# EAGLE board NN22_7Lvl_ResSrcAdapter02_s00 (EAGLE 7.7.0)
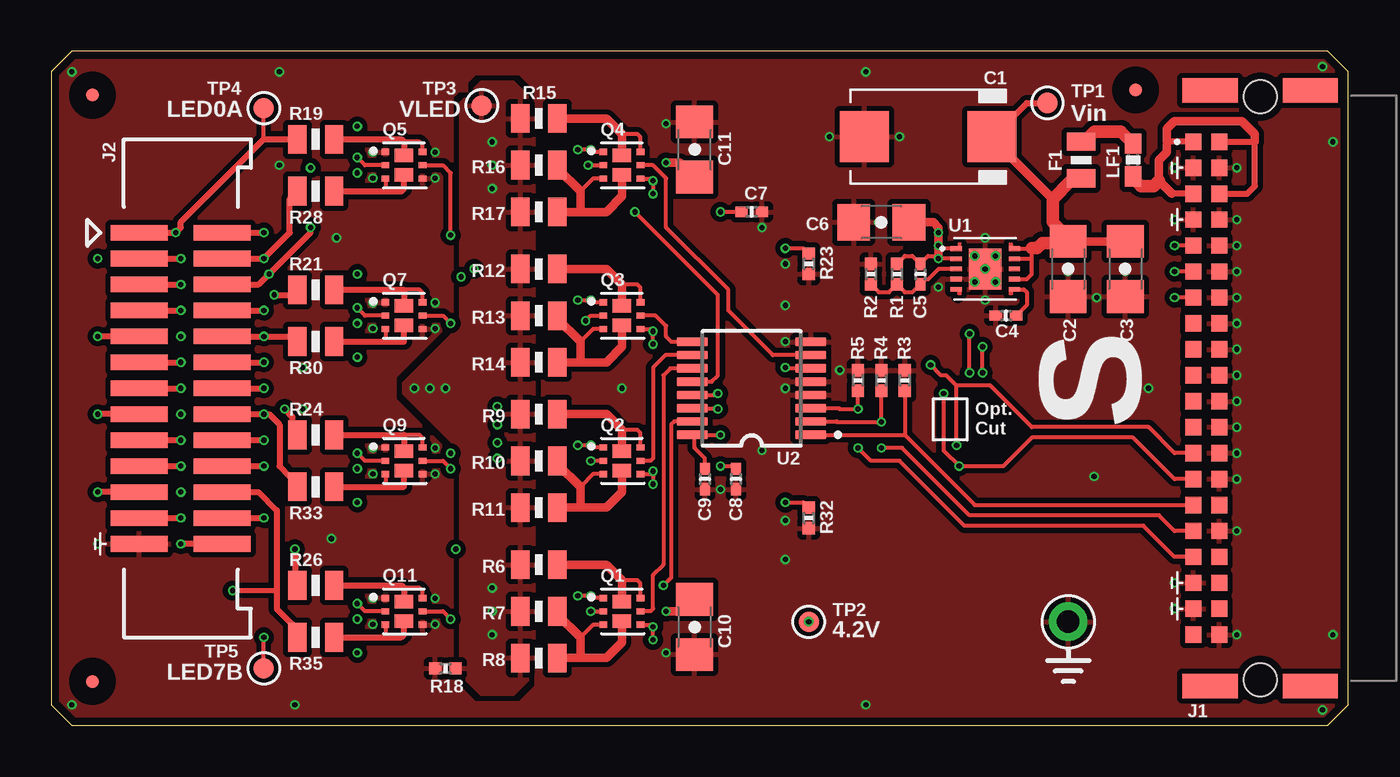
[diagram p0: board, top side]
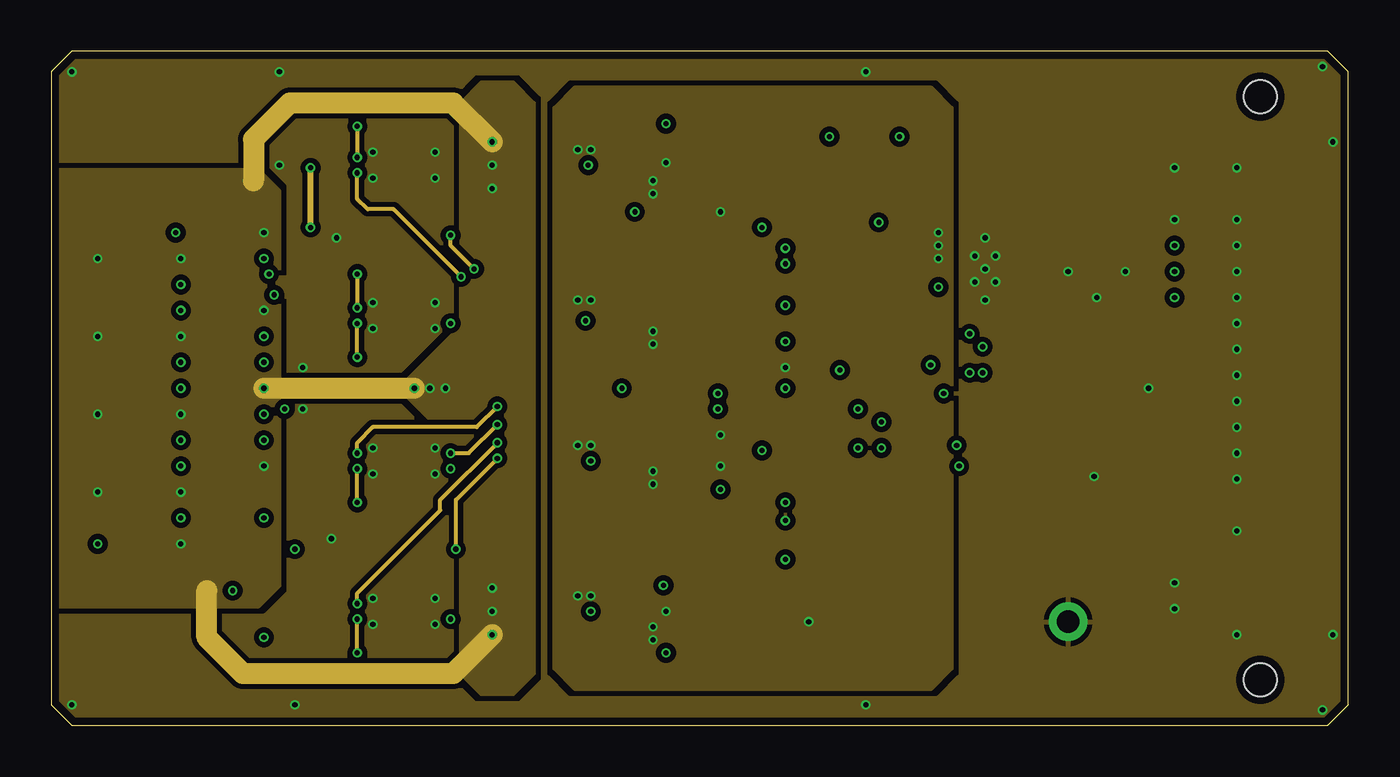
[diagram p1: board, inner layer Route2]
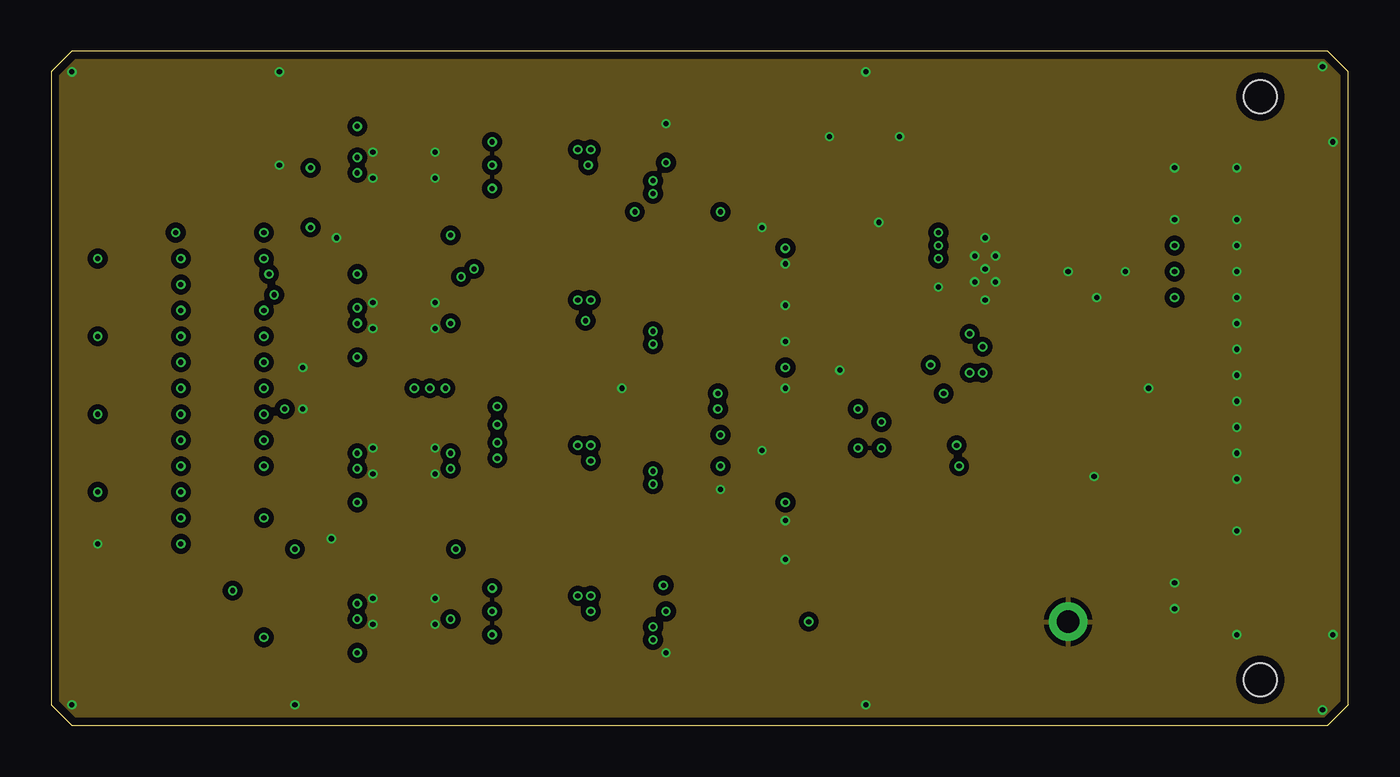
[diagram p2: board, inner layer Route15]
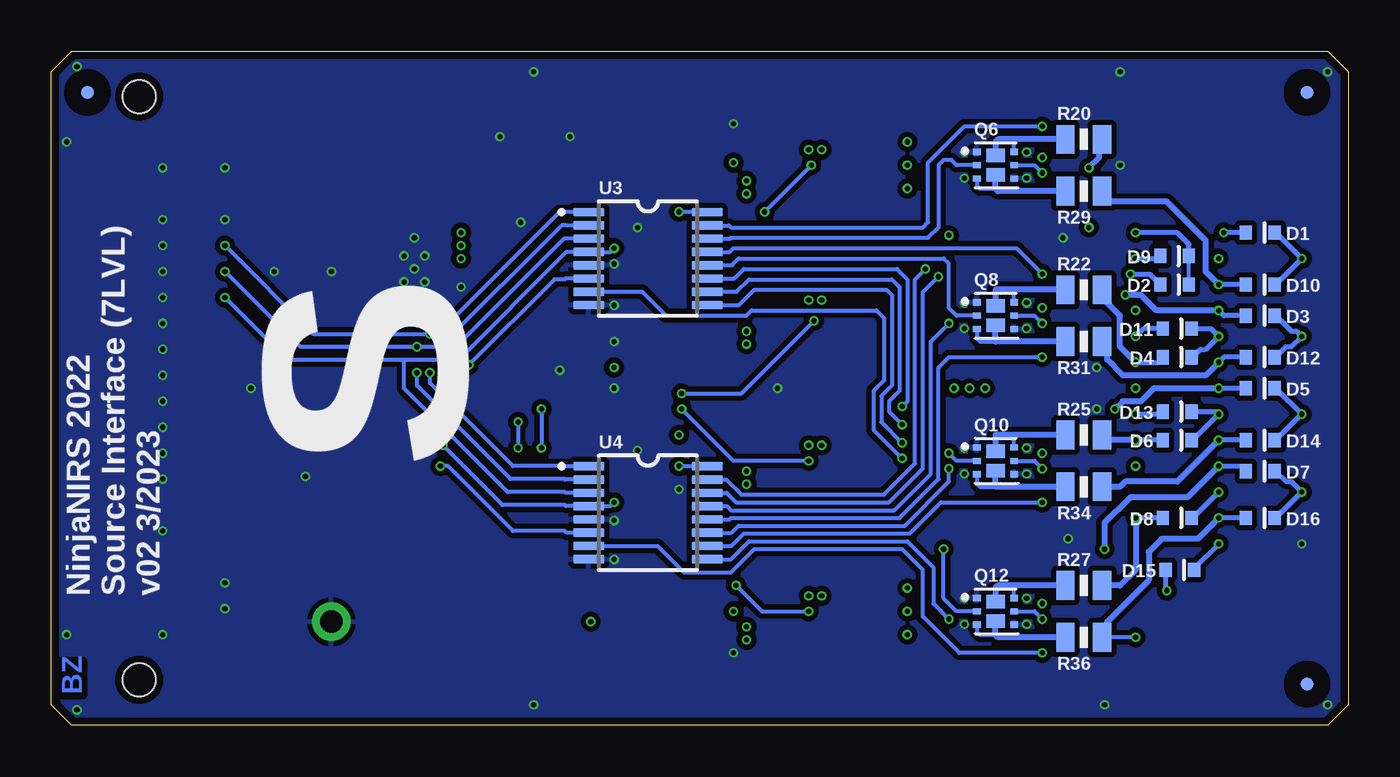
[diagram p3: board, bottom side, seen from below]

Size 63.5 x 33.02 mm. Coordinates in mm from the lower left corner, seen from the top.
Outline: 63.5,1.02 63.5,32 62.48,33.02 1.02,33.02 0,32 0,1.02 1.02,0 62.48,0 63.5,1.02
Copper layers (1*2*15*16): Top 0.035559375mm / dielectric 0.17018125mm / Route2 0.01778125mm / dielectric 47mil / Route15 0.01778125mm / dielectric 0.17018125mm / Bottom 0.035559375mm
Design rules "OSHPark-4layer *": minimum track width 5mil, minimum drill 10mil, track to track 5mil, track to pad 5mil, pad to pad 5mil, via to via 5mil, smd to smd 5mil, copper to edge 15mil, drill to drill 6mil, minimum pad ring 4mil, minimum via ring 4mil, stop-mask expansion 2.5mil, vias tented up to drill 12mil, thermal gap 10mil
tRestrict: 16 lines

## Footprints (pad centres in the part's own frame; a part is rotated, then mirrored left to right if it is on the bottom)
2917-CAP = smd 2.4 x 2.5: N 3.125,0; P -3.125,0
1206 = smd 1.6 x 1.8: 1 -1.35,0; 2 1.35,0
0402-CAP = smd 0.6 x 0.5: 1 -0.5,0; 2 0.5,0
SOD523 = smd 0.6 x 0.7: A -0.7,0; C 0.7,0
0805 = smd 0.9 x 1.4: 1 -0.9,0; 2 0.9,0
MICRO-FIDUCIAL = smd 0.635 x 0.635: 1 0,0
M20X2_HARFLEX_M = smd 0.8 x 0.8: A1 12.065,2; A2 10.795,2; A3 9.525,2; A4 8.255,2; A5 6.985,2; A6 5.715,2; A7 4.445,2; A8 3.175,2; A9 1.905,2; A10 0.635,2; A11 -0.635,2; A12 -1.905,2; A13 -3.175,2; A14 -4.445,2; A15 -5.715,2; A16 -6.985,2; A17 -8.255,2; A18 -9.525,2; A19 -10.795,2; A20 -12.065,2; B1 12.065,3.27; B2 10.795,3.27; B3 9.525,3.27; B4 8.255,3.27; B5 6.985,3.27; B6 5.715,3.27; B7 4.445,3.27; B8 3.175,3.27; B9 1.905,3.27; B10 0.635,3.27; B11 -0.635,3.27; B12 -1.905,3.27; B13 -3.175,3.27; B14 -4.445,3.27; B15 -5.715,3.27; B16 -6.985,3.27; B17 -8.255,3.27; B18 -9.525,3.27; B19 -10.795,3.27; B20 -12.065,3.27 | smd 1.2 x 2.7: P$17 -14.575,2.45; P$18 -14.575,-2.45; P$19 14.575,2.45; P$20 14.575,-2.45 | hole 1.6: -14.275,0; 14.275,0
M13X2_0.050_SHF = smd 2.794 x 0.762: 1 -2.032,7.62; 2 2.032,7.62; 3 -2.032,6.35; 4 2.032,6.35; 5 -2.032,5.08; 6 2.032,5.08; 7 -2.032,3.81; 8 2.032,3.81; 9 -2.032,2.54; 10 2.032,2.54; 11 -2.032,1.27; 12 2.032,1.27; 13 -2.032,0; 14 2.032,0; 15 -2.032,-1.27; 16 2.032,-1.27; 17 -2.032,-2.54; 18 2.032,-2.54; 19 -2.032,-3.81; 20 2.032,-3.81; 21 -2.032,-5.08; 22 2.032,-5.08; 23 -2.032,-6.35; 24 2.032,-6.35; 25 -2.032,-7.62; 26 2.032,-7.62
0603-FER = smd 1 x 0.8: 1 -0.8,0; 2 0.8,0
UDFN8 = smd 0.375 x 0.3: 1 -0.91,0.65; 2 -0.91,0; 3 -0.91,-0.65; 4 0.91,-0.65; 5 0.91,0; 6 0.91,0.65 | smd 0.9 x 0.65: P1 0,0.475; P2 0,-0.475
0402-RES = smd 0.6 x 0.6: 1 -0.5,0; 2 0.5,0
TESTPAD_ROUND = smd 1.016 x 1.016: P$1 0,0
1X01 = drill 1.1 pad 1.88: 1 0,0
DFN10_ISL = smd 0.55 x 0.23: 1 -1.425,1; 2 -1.425,0.5; 3 -1.425,0; 4 -1.425,-0.5; 5 -1.425,-1; 6 1.425,-1; 7 1.425,-0.5; 8 1.425,0; 9 1.425,0.5; 10 1.425,1 | smd 1.6 x 2: PAD 0,0
TSSOP16 = smd 1.5 x 0.42: 1 -2.9,2.275; 2 -2.9,1.625; 3 -2.9,0.975; 4 -2.9,0.325; 5 -2.9,-0.325; 6 -2.9,-0.975; 7 -2.9,-1.625; 8 -2.9,-2.275; 9 2.9,-2.275; 10 2.9,-1.625; 11 2.9,-0.975; 12 2.9,-0.325; 13 2.9,0.325; 14 2.9,0.975; 15 2.9,1.625; 16 2.9,2.275

## Placement (x,y rotation side)
C1  100u  [2917-CAP]  42.93,28.83 180 top
C2  22u  [1206]  49.78,22.35 270 top
C3  22u  [1206]  52.58,22.35 270 top
C4  0.1u  [0402-CAP]  46.74,20.07 180 top
C5  47p  [0402-CAP]  42.55,22.1 270 top
C6  22u  [1206]  40.64,24.64 180 top
C7  0.1u  [0402-CAP]  34.29,25.15 0 top
C8  0.1u  [0402-CAP]  33.53,12.06 270 top
C9  0.1u  [0402-CAP]  32,12.06 270 top
C10  22u  [1206]  31.5,4.83 270 top
C11  22u  [1206]  31.5,28.19 90 top
D1  SBR1A20T5  [SOD523]  4.32,24.13 0 bottom
D2  SBR1A20T5  [SOD523]  8.51,21.59 0 bottom
D3  SBR1A20T5  [SOD523]  4.32,20.07 0 bottom
D4  SBR1A20T5  [SOD523]  8.38,18.03 0 bottom
D5  SBR1A20T5  [SOD523]  4.32,16.51 0 bottom
D6  SBR1A20T5  [SOD523]  8.38,13.97 0 bottom
D7  SBR1A20T5  [SOD523]  4.32,12.45 0 bottom
D8  SBR1A20T5  [SOD523]  8.38,10.16 0 bottom
D9  SBR1A20T5  [SOD523]  8.51,22.99 0 bottom
D10  SBR1A20T5  [SOD523]  4.32,21.59 0 bottom
D11  SBR1A20T5  [SOD523]  8.38,19.43 0 bottom
D12  SBR1A20T5  [SOD523]  4.32,18.03 0 bottom
D13  SBR1A20T5  [SOD523]  8.38,15.37 0 bottom
D14  SBR1A20T5  [SOD523]  4.32,13.97 0 bottom
D15  SBR1A20T5  [SOD523]  8.26,7.62 0 bottom
D16  SBR1A20T5  [SOD523]  4.32,10.16 0 bottom
F1  SMD0805B050TF  [0805]  50.42,27.69 270 top
FID1  FIDUCIALUFIDUCIAL  [MICRO-FIDUCIAL]  2.03,30.86 0 top
FID2  FIDUCIALUFIDUCIAL  [MICRO-FIDUCIAL]  2.03,30.99 0 bottom
FID3  FIDUCIALUFIDUCIAL  [MICRO-FIDUCIAL]  2.03,2.16 0 top
FID4  FIDUCIALUFIDUCIAL  [MICRO-FIDUCIAL]  2.03,2.03 0 bottom
FID5  FIDUCIALUFIDUCIAL  [MICRO-FIDUCIAL]  53.09,31.11 0 top
FID6  FIDUCIALUFIDUCIAL  [MICRO-FIDUCIAL]  61.72,30.99 0 bottom
J1  M20X2_HARFLEX_M  [M20X2_HARFLEX_M]  59.18,16.51 90 top
J2  M13X2_0.050_SHF  [M13X2_0.050_SHF]  6.35,16.51 0 top
LF1  FERRITE0603  [0603-FER]  52.96,27.69 90 top
Q1  MOSFET-DUAL-P-UDFN8  [UDFN8]  27.94,5.59 0 top
Q2  MOSFET-DUAL-P-UDFN8  [UDFN8]  27.94,12.95 0 top
Q3  MOSFET-DUAL-P-UDFN8  [UDFN8]  27.94,20.07 0 top
Q4  MOSFET-DUAL-P-UDFN8  [UDFN8]  27.94,27.43 0 top
Q5  MOSFET-DUAL-N-UDFN8  [UDFN8]  17.27,27.43 0 top
Q6  MOSFET-DUAL-N-UDFN8  [UDFN8]  17.27,27.43 0 bottom
Q7  MOSFET-DUAL-N-UDFN8  [UDFN8]  17.27,20.07 0 top
Q8  MOSFET-DUAL-N-UDFN8  [UDFN8]  17.27,20.07 0 bottom
Q9  MOSFET-DUAL-N-UDFN8  [UDFN8]  17.27,12.95 0 top
Q10  MOSFET-DUAL-N-UDFN8  [UDFN8]  17.27,12.95 0 bottom
Q11  MOSFET-DUAL-N-UDFN8  [UDFN8]  17.27,5.59 0 top
Q12  MOSFET-DUAL-N-UDFN8  [UDFN8]  17.27,5.59 0 bottom
R1  2.7k  [0402-RES]  41.4,22.1 90 top
R2  365  [0402-RES]  40.13,22.1 270 top
R3  100k  [0402-RES]  41.78,16.89 270 top
R4  100k  [0402-RES]  40.64,16.89 270 top
R5  100k  [0402-RES]  39.5,16.89 270 top
R6  DNP  [0805]  23.88,7.87 0 top
R7  270  [0805]  23.88,5.59 0 top
R8  270  [0805]  23.88,3.3 0 top
R9  1.2k  [0805]  23.88,15.24 0 top
R10  39  [0805]  23.88,12.95 0 top
R11  DNP  [0805]  23.88,10.67 0 top
R12  560  [0805]  23.88,22.35 0 top
R13  39  [0805]  23.88,20.07 0 top
R14  39  [0805]  23.88,17.78 0 top
R15  270  [0805]  23.88,29.72 0 top
R16  15  [0805]  23.88,27.43 0 top
R17  15  [0805]  23.88,25.15 0 top
R18  100k  [0402-RES]  19.3,2.79 0 top
R19  5.1  [0805]  12.95,28.7 180 top
R20  5.1  [0805]  12.95,28.7 0 bottom
R21  5.1  [0805]  12.95,21.34 180 top
R22  5.1  [0805]  12.95,21.34 0 bottom
R23  100k  [0402-RES]  37.08,22.61 90 top
R24  5.1  [0805]  12.95,14.22 180 top
R25  5.1  [0805]  12.95,14.22 0 bottom
R26  5.1  [0805]  12.95,6.86 180 top
R27  5.1  [0805]  12.95,6.86 0 bottom
R28  6.2  [0805]  12.95,26.16 180 top
R29  6.2  [0805]  12.95,26.16 0 bottom
R30  6.2  [0805]  12.95,18.8 180 top
R31  6.2  [0805]  12.95,18.8 0 bottom
R32  100k  [0402-RES]  37.08,10.16 90 top
R33  6.2  [0805]  12.95,11.68 180 top
R34  6.2  [0805]  12.95,11.68 0 bottom
R35  6.2  [0805]  12.95,4.32 180 top
R36  6.2  [0805]  12.95,4.32 0 bottom
TP1  TESTPOINT_ROUND  [TESTPAD_ROUND]  48.77,30.48 0 top
TP2  TESTPOINT_ROUND  [TESTPAD_ROUND]  37.08,5.08 0 top
TP3  TESTPOINT_ROUND  [TESTPAD_ROUND]  21.08,30.35 0 top
TP4  TESTPOINT_ROUND  [TESTPAD_ROUND]  10.41,30.23 0 top
TP5  TESTPOINT_ROUND  [TESTPAD_ROUND]  10.41,2.79 0 top
TP6  TESTPOINT1X01  [1X01]  49.78,5.08 0 top
U1  ISL80103  [DFN10_ISL]  45.72,22.35 0 top
U2  74HC138_TSSOP  [TSSOP16]  34.29,16.51 180 top
U3  74HC238_TSSOP  [TSSOP16]  34.29,22.86 0 bottom
U4  74HC238_TSSOP  [TSSOP16]  34.29,10.41 0 bottom

## Library data of the parts
C1-C11 D1-D16 F1 FID1-FID6 J1 J2 LF1 Q1-Q12 R1-R36 TP1-TP6 U1-U4 = MyLib

## Nets
COLA: J1.B13 R32.2 U3.6 U4.4
COLB: J1.B14 R23.2 U3.4 U4.6
GND: C1.N C2.2 C3.2 C4.2 C6.2 C7.2 C8.2 C9.2 C10.2 C11.2 J1.A2 J1.A4 J1.A5 J1.A6 J1.A7 J1.A8 J1.A9 J1.A10 J1.A11 J1.A12 J1.A13 J1.A14 J1.A16 J1.A20 J1.B2 J1.B4 J1.B18 J1.B19 J2.25 Q5.1 Q5.4 Q6.1 Q6.4 Q7.1 Q7.4 Q8.1 Q8.4 Q9.1 Q9.4 Q10.1 Q10.4 Q11.1 Q11.4 Q12.1 Q12.4 R2.1 R3.1 R4.1 R5.1 R18.1 R23.1 R32.1 TP6.1 U1.4 U1.5 U1.PAD U2.4 U2.5 U2.8 U3.5 U3.8 U4.5 U4.8
LED_0A: D1.A J2.1 R19.2 TP4.P$1
LED_0B: D9.A J2.4 R28.2
LED_1A: D2.A J2.6 R20.2
LED_1B: D10.A J2.5 R29.2
LED_2A: D3.A J2.7 R21.2
LED_2B: D11.A J2.10 R30.2
LED_3A: D4.A J2.12 R22.2
LED_3B: D12.A J2.11 R31.2
LED_4A: D5.A J2.13 R24.2
LED_4B: D13.A J2.16 R33.2
LED_5A: D6.A J2.18 R25.2
LED_5B: D14.A J2.17 R34.2
LED_6A: D7.A J2.19 R26.2
LED_6B: D15.A J2.22 R35.2
LED_7A: D8.A J2.24 R27.2
LED_7B: D16.A J2.23 R36.2 TP5.P$1
N$1: Q7.2 U3.13
N$2: Q7.6 Q7.P1 R21.1
N$3: C4.1 U1.6
N$4: Q5.2 U3.15
N$5: Q5.6 Q5.P1 R19.1
N$6: Q1.2 U2.15
N$7: Q2.2 U2.14
N$8: Q5.5 U4.15
N$9: Q5.3 Q5.P2 R28.1
N$10: Q8.2 U3.12
N$11: Q3.2 U2.13
N$12: Q4.2 U2.12
N$13: Q7.5 U4.13
N$14: Q7.3 Q7.P2 R30.1
N$15: Q6.2 U3.14
N$16: Q6.6 Q6.P1 R20.1
N$17: Q1.5 U2.11
N$18: Q2.5 U2.10
N$19: Q6.5 U4.14
N$20: Q6.3 Q6.P2 R29.1
N$21: Q3.5 U2.9
N$22: Q4.5 U2.7
N$23: Q1.6 Q1.P1 R6.2
N$24: Q1.3 Q1.P2 R7.2 R8.2
N$25: Q2.3 Q2.P2 R10.2 R11.2
N$26: Q8.6 Q8.P1 R22.1
N$27: Q2.6 Q2.P1 R9.2
N$28: Q3.6 Q3.P1 R12.2
N$29: Q8.5 U4.12
N$30: Q8.3 Q8.P2 R31.1
N$31: Q3.3 Q3.P2 R13.2 R14.2
N$32: Q4.6 Q4.P1 R15.2
N$33: Q9.2 U3.11
N$34: Q9.6 Q9.P1 R24.1
N$35: Q4.3 Q4.P2 R16.2 R17.2
N$37: Q9.5 U4.11
N$38: Q9.3 Q9.P2 R33.1
N$41: Q10.2 U3.10
N$42: Q10.6 Q10.P1 R25.1
N$45: Q10.5 U4.10
N$46: Q10.3 Q10.P2 R34.1
N$49: Q11.2 U3.9
N$50: Q11.6 Q11.P1 R26.1
N$53: Q11.5 U4.9
N$54: Q11.3 Q11.P2 R35.1
N$57: Q12.2 U3.7
N$58: Q12.6 Q12.P1 R27.1
N$61: Q12.5 U4.7
N$62: Q12.3 Q12.P2 R36.1
N$65: F1.1 LF1.2
N$66: C1.P C2.1 C3.1 F1.2 TP1.P$1 U1.7 U1.9 U1.10
N$68: C5.2 R1.1 R2.2 U1.3
PWR0: J1.B15 R3.2 U2.1
PWR1: J1.B16 R4.2 U2.2
PWR2: J1.B17 R5.2 U2.3
ROW0: J1.B5 U3.1 U4.1
ROW1: J1.B6 U3.2 U4.2
ROW2: J1.B7 U3.3 U4.3
V4P2: C5.1 C6.1 C7.1 C8.1 C9.1 C10.1 C11.1 Q1.1 Q1.4 Q2.1 Q2.4 Q3.1 Q3.4 Q4.1 Q4.4 R1.2 TP2.P$1 U1.1 U1.2 U2.6 U2.16 U3.16 U4.16
V5P0_IN: J1.A1 J1.A3 J1.B1 J1.B3 LF1.1
VLED: D1.C D2.C D3.C D4.C D5.C D6.C D7.C D8.C D9.C D10.C D11.C D12.C D13.C D14.C D15.C D16.C J2.2 J2.3 J2.8 J2.9 J2.14 J2.15 J2.20 J2.21 J2.26 R6.1 R7.1 R8.1 R9.1 R10.1 R11.1 R12.1 R13.1 R14.1 R15.1 R16.1 R17.1 R18.2 TP3.P$1

## Tracks (layer width: path | path; a pad name or v marks a point on that pad's centre or on a via)
COLA  (via drill 0.25)
  Top 0.203: J1.B13 54.99,13.34 53.72,14.61 48.01,14.61 45.97,16.64 44.32,16.64 | 44.32,16.64 43.81,17.14 43.56,17.14 v43.05,17.65 | v44.32,13.72 44.32,16.64 | v35.94,10.92 36.82,10.92 R32.2
  Bottom 0.203: v44.32,13.72 41.4,10.79 38.35,10.79 38.3,10.74 U4.4 36.12,10.74 v35.94,10.92 | U3.6 38.31,21.89 38.35,21.84 38.86,21.84 v43.05,17.65
COLB  (via drill 0.25)
  Top 0.203: v43.69,16.26 43.69,13.46 v44.45,12.7 46.61,12.7 48.01,14.1 52.96,14.1 54.99,12.06 J1.B14 | v35.94,23.37 36.82,23.37 R23.2
  Bottom 0.203: U4.6 38.27,9.44 38.35,9.53 40.89,9.53 44.07,12.7 v44.45,12.7 | v43.69,16.26 43.69,17.78 38.28,23.18 U3.4 36.12,23.18 v35.94,23.37
GND  (via drill 0.25)
  other vias: 58.04,24.77 58.04,23.5 58.04,22.23 58.04,20.95 58.04,19.68 58.04,18.41 58.04,17.14 58.04,15.88 58.04,14.61 58.04,13.34 58.04,12.06 58.04,27.3 54.99,27.3 54.99,24.77 58.04,9.53 54.99,6.99 54.99,5.71 58.04,4.45 49.78,22.23 51.05,12.19 45.72,23.88 45.72,20.83 38.61,17.4 41.53,28.83 38.1,28.83 15.75,26.8 18.8,26.8 18.8,28.07 15.75,28.07 18.8,20.7 18.8,19.43 15.75,19.43 15.75,20.7 2.29,8.89 11.94,1.02 18.8,13.59 18.8,12.32 15.75,12.32 15.75,13.59 18.8,6.22 18.8,4.95 15.75,4.95 15.75,6.22 11.18,32 1.02,32 11.18,27.43 13.97,23.88 12.32,17.53 1.02,1.02 62.23,0.76 62.23,32.26 13.72,9.14 62.74,28.57 52.58,22.23 51.18,20.95 35.94,18.8 35.94,16.51 35.94,8.13 35.94,10.03 32.77,11.56 35.94,22.61 35.94,20.57 34.8,24.38 30.1,29.46 30.1,3.56 12.32,15.49 27.94,16.51 43.43,21.46 34.8,13.46 45.21,22.99 46.23,22.99 45.21,21.72 46.23,21.72 45.72,22.35 40.51,24.64 39.88,1.02 39.88,32 53.72,16.51 62.74,4.45
  pour Route2 (isolate 0.254, rank 6): 0,0 63.5,0 63.5,33.02 0,33.02
  pour Top (isolate 0.254, rank 6): 0,33.02 0,0 63.5,0 63.5,33.02
  pour Bottom (isolate 0.254, rank 3): 0,33.02 0,0 63.5,0 63.5,33.02
  pour Route15 (isolate 0.254): 0,0 0,33.02 63.5,33.02 63.5,0
LED_0A  (via drill 0.25)
  Top 0.203: 10.41,28.7 TP4.P$1
  Top 0.305: J2.1 v6.1,24.13 6.35,24.38 6.35,24.64 10.41,28.7 R19.2
  Bottom 0.254: D1.A v6.1,24.13
LED_0B  (via drill 0.25)
  Top 0.305: J2.4 v10.41,22.86 11.68,24.13 11.68,25.79 R28.2
  Bottom 0.254: v10.41,22.86 9.34,22.86 D9.A
LED_1A  (via drill 0.25)
  Top 0.305: J2.6 10.16,21.59 v10.67,22.1 12.7,24.13 v12.7,24.38
  Route2 0.305: v12.7,24.38 v12.7,27.3
  Bottom 0.254: v10.67,22.1 9.72,22.1 D2.A
  Bottom 0.305: v12.7,27.3 12.19,27.81 12.19,28.56 R20.2
LED_1B  (via drill 0.25)
  Top 0.305: J2.5 v6.35,21.59
  Bottom 0.254: D10.A v6.35,21.59
  Bottom 0.305: R29.2 12.05,25.65 8.89,25.65 6.99,23.75 6.99,22.23 v6.35,21.59
LED_2A  (via drill 0.25)
  Top 0.305: J2.7 v6.35,20.32 | v10.92,21.08 12.05,21.08 R21.2
  Bottom 0.254: D3.A 6.1,20.07 v6.35,20.32
  Bottom 0.305: v6.35,20.32 9.4,20.32 10.16,21.08 v10.92,21.08
LED_2B  (via drill 0.25)
  Top 0.305: J2.10 v10.41,19.05 11.8,19.05 R30.2
  Bottom 0.254: D11.A 10.03,19.43 v10.41,19.05
LED_3A  (via drill 0.25)
  Top 0.305: J2.12 v10.41,17.78
  Bottom 0.254: v10.41,17.78 9.34,17.78 D4.A
  Bottom 0.305: v10.41,17.78 11.18,18.54 11.18,20.07 11.94,20.83 11.94,21.22 R22.2
LED_3B  (via drill 0.25)
  Top 0.305: J2.11 v6.35,17.78
  Bottom 0.254: D12.A 6.1,18.03 v6.35,17.78
  Bottom 0.305: v6.35,17.78 6.99,17.14 11.05,17.14 11.81,17.91 11.81,18.55 R31.2
LED_4A  (via drill 0.25)
  Top 0.305: J2.13 v6.35,16.51 | v11.43,15.49 11.81,15.11 11.81,14.47 R24.2
  Bottom 0.254: D5.A v6.35,16.51
  Bottom 0.305: v6.35,16.51 9.53,16.51 10.16,15.88 11.05,15.88 v11.43,15.49
LED_4B  (via drill 0.25)
  Top 0.305: J2.16 v10.41,15.24 10.67,15.24 11.18,14.73 11.18,12.7 11.68,12.19 11.94,12.19 11.94,11.8 R33.2
  Bottom 0.254: v10.41,15.24 9.21,15.24 D13.A
LED_5A  (via drill 0.25)
  Top 0.305: J2.18 v10.41,13.97
  Bottom 0.254: D6.A v10.41,13.97
  Bottom 0.305: v10.41,13.97 11.8,13.97 R25.2
LED_5B  (via drill 0.25)
  Top 0.305: J2.17 v6.35,13.97
  Bottom 0.254: D14.A v6.35,13.97
  Bottom 0.305: v6.35,13.97 8.38,11.94 10.92,11.94 11.18,11.68 R34.2
LED_6A  (via drill 0.25)
  Top 0.305: J2.19 v6.35,12.7 | v11.94,8.64 11.94,6.97 R26.2
  Bottom 0.254: v6.35,12.7 5.27,12.7 D7.A
  Bottom 0.305: v6.35,12.7 7.87,11.18 10.67,11.18 11.94,9.91 v11.94,8.64
LED_6B  (via drill 0.25)
  Top 0.254: v8.89,6.6 11.05,6.6
  Top 0.305: J2.22 10.16,11.43 11.05,10.54 11.05,6.6 11.05,5.71 11.81,4.95 11.81,4.56 R35.2
  Bottom 0.254: D15.A 8.96,6.67 v8.89,6.6
LED_7A  (via drill 0.25)
  Top 0.305: J2.24 v10.41,10.16
  Bottom 0.254: D8.A v10.41,10.16
  Bottom 0.305: v10.41,10.16 10.41,7.62 11.18,6.86 R27.2
LED_7B  (via drill 0.25)
  Top 0.203: TP5.P$1 v10.41,4.32
  Top 0.305: J2.23 v6.35,10.16
  Bottom 0.203: v10.41,4.32 R36.2
  Bottom 0.254: D16.A v6.35,10.16
  Bottom 0.305: R36.2 12.05,4.58 11.81,4.83 11.81,5.08 9.78,7.11 9.78,8.51 9.14,9.14 7.37,9.14 v6.35,10.16
N$1  (via drill 0.25)
  Top 0.203: Q7.2 15.37,20.07 v14.99,20.45
  Route2 0.203: v14.99,22.1 v14.99,20.45
  Bottom 0.203: U3.13 30.28,23.18 30.1,23.37 16.26,23.37 v14.99,22.1
N$2
  Top 0.203: Q7.6 18.18,21.19 18.03,21.34 17.27,21.34
  Top 0.305: R21.1 17.27,21.34 Q7.P1
N$3
  Top 0.203: U1.6 47.61,21.35 47.75,21.21 47.75,20.58 C4.1
N$4  (via drill 0.25)
  Top 0.203: Q5.2 15.37,27.43 v14.99,27.81
  Route2 0.203: v14.99,29.34 v14.99,27.81
  Bottom 0.203: U3.15 30.33,24.48 30.23,24.38 20.83,24.38 20.57,24.64 20.57,27.56 18.8,29.34 v14.99,29.34
N$5
  Top 0.203: Q5.6 18.18,28.43 18.03,28.57 17.27,28.57
  Top 0.305: R19.1 17.14,28.7 17.27,28.57 Q5.P1
N$6  (via drill 0.25)
  Top 0.203: U2.15 30.51,14.88 30.35,14.73 30.35,7.24 v29.97,6.86 | v26.42,5.59 Q1.2
  Bottom 0.203: v29.97,6.86 28.7,5.59 v26.42,5.59
N$7  (via drill 0.25)
  Top 0.203: Q2.2 v26.42,12.95 | v32.64,15.49 31.43,15.49 U2.14
  Bottom 0.203: v26.42,12.95 30.1,12.95 v32.64,15.49
N$8  (via drill 0.25)
  Top 0.203: Q5.5 19.18,27.43 19.56,27.05 v19.56,24
  Route2 0.203: v20.7,22.35 19.56,23.5 v19.56,24
  Bottom 0.203: U4.15 30.45,12.04 29.72,11.3 22.73,11.3 21.21,12.83 21.21,21.84 v20.7,22.35
N$9
  Top 0.203: Q5.3 16.36,26.27 16.26,26.16
  Top 0.305: R28.1 16.26,26.16 17.14,26.16 17.27,26.29 Q5.P2
N$10
  Bottom 0.203: Q8.2 19.18,20.07 19.56,20.45 19.56,22.61 19.81,22.86 29.84,22.86 30.17,22.54 U3.12
N$11  (via drill 0.25)
  Top 0.203: U2.13 32.57,16.18 v32.64,16.26 | v26.16,19.81 26.42,20.07 Q3.2
  Bottom 0.203: v32.64,16.26 29.72,16.26 v26.16,19.81
N$12  (via drill 0.25)
  Top 0.203: U2.12 32.33,16.84 32.64,17.14 32.64,21.08 v28.57,25.15 | v26.29,27.43 Q4.2
  Bottom 0.203: v28.57,25.15 v26.29,27.43
N$13  (via drill 0.25)
  Top 0.203: Q7.5 19.18,20.07 v19.56,19.68
  Bottom 0.203: v19.56,19.68 20.45,18.8 20.45,12.32 22.23,10.54 30.23,10.54 30.42,10.74 U4.13
N$14
  Top 0.203: Q7.3 16.36,18.82 16.38,18.8
  Top 0.305: R30.1 16.38,18.8 17.27,18.8 Q7.P2
N$15
  Bottom 0.203: Q6.2 19.18,27.43 19.43,27.69 19.81,27.69 20.07,27.43 20.07,24.38 20.57,23.88 30.23,23.88 30.27,23.84 U3.14
N$16
  Bottom 0.203: Q6.6 16.36,28.68 16.38,28.7
  Bottom 0.305: R20.1 16.38,28.7 17.14,28.7 17.27,28.57 Q6.P1
N$17
  Top 0.203: U2.11 30.31,17.48 29.97,17.14 29.97,7.87 29.46,7.37 29.46,5.71 29.34,5.59 Q1.5
N$18
  Top 0.203: U2.10 30.07,18.14 29.46,17.53 29.46,13.08 29.34,12.95 Q2.5
N$19  (via drill 0.25)
  Route2 0.203: v20.07,21.97 16.76,25.27 15.49,25.27 14.99,25.78 v14.99,27.05
  Bottom 0.203: Q6.5 15.37,27.43 v14.99,27.05 | U4.14 30.44,11.39 29.97,10.92 22.48,10.92 20.83,12.57 20.83,21.21 v20.07,21.97
N$20
  Bottom 0.203: Q6.3 18.18,26.44 18.03,26.29 17.27,26.29
  Bottom 0.305: R29.1 17.14,26.16 17.27,26.29 Q6.P2
N$21
  Top 0.203: U2.9 30.36,18.79 30.1,19.05 30.1,19.56 29.59,20.07 Q3.5
N$22
  Top 0.203: U2.7 35.33,18.14 33.15,20.32 33.15,21.34 30.1,24.38 30.1,26.8 29.46,27.43 Q4.5
N$23
  Top 0.203: Q1.6 28.85,6.96 28.7,7.11 27.94,7.11
  Top 0.406: R6.2 27.18,7.87 27.94,7.11 Q1.P1
N$24
  Top 0.203: Q1.3 26.53,4.94 25.91,4.32
  Top 0.406: R8.2 25.91,3.3 | 25.91,3.3 27.18,3.3 27.94,4.06 Q1.P2 | R7.2 24.78,5.45 25.91,4.32 25.91,3.3
N$25
  Top 0.203: Q2.3 26.53,12.3 25.91,11.68
  Top 0.406: R11.2 25.91,10.67 | 25.91,10.67 27.18,10.67 27.94,11.43 Q2.P2 | R10.2 24.78,12.82 25.91,11.68 25.91,10.67
N$26
  Bottom 0.203: Q8.6 16.36,21.32 16.38,21.34
  Bottom 0.305: R22.1 16.38,21.34 17.27,21.34 Q8.P1
N$27
  Top 0.203: Q2.6 28.85,14.33 28.7,14.48 27.94,14.48
  Top 0.406: R9.2 27.18,15.24 27.94,14.48 Q2.P1
N$28
  Top 0.203: Q3.6 28.85,21.44 28.7,21.59 27.94,21.59
  Top 0.406: R12.2 27.18,22.35 27.94,21.59 Q3.P1
N$29  (via drill 0.25)
  Route2 0.203: v14.99,18.03 v14.99,19.68
  Bottom 0.203: Q8.5 15.37,20.07 v14.99,19.68 | U4.12 30.3,10.09 30.23,10.16 21.97,10.16 20.07,12.06 20.07,17.53 19.56,18.03 v14.99,18.03
N$30
  Bottom 0.203: Q8.3 18.18,18.94 18.03,18.8 17.27,18.8
  Bottom 0.305: R31.1 17.27,18.8 Q8.P2
N$31
  Top 0.203: Q3.3 26.53,19.42 25.91,18.8
  Top 0.406: R14.2 25.91,17.78 | 25.91,17.78 27.18,17.78 27.94,18.54 Q3.P2 | R13.2 24.78,19.93 25.91,18.8 25.91,17.78
N$32
  Top 0.203: Q4.6 28.85,28.81 28.7,28.96 27.94,28.96
  Top 0.406: R15.2 27.18,29.72 27.94,28.96 Q4.P1
N$33  (via drill 0.25)
  Top 0.203: Q9.2 15.37,12.95 v14.99,13.34
  Route2 0.203: v14.99,13.34 14.99,13.84 15.75,14.61 20.83,14.61 v21.84,15.62
  Bottom 0.203: U3.11 30.06,21.89 29.59,22.35 22.1,22.35 21.59,21.84 21.59,15.88 v21.84,15.62
N$34
  Top 0.203: Q9.6 18.18,14.08 18.03,14.22 17.27,14.22
  Top 0.305: R24.1 17.27,14.22 Q9.P1
N$35
  Top 0.203: Q4.3 26.53,26.78 25.91,26.16
  Top 0.406: R17.2 25.91,25.15 | 25.91,25.15 27.18,25.15 27.94,25.91 Q4.P2 | R16.2 24.78,27.29 25.91,26.16 25.91,25.15
N$37  (via drill 0.25)
  Top 0.203: Q9.5 19.18,12.95 v19.56,12.57
  Bottom 0.203: U4.11 30.18,9.44 29.84,9.78 21.72,9.78 19.56,11.94 v19.56,12.57
N$38
  Top 0.203: Q9.3 16.36,11.71 16.38,11.68
  Top 0.305: R33.1 16.38,11.68 17.27,11.68 Q9.P2
N$41  (via drill 0.25)
  Route2 0.203: v19.56,13.34 20.45,13.34 v21.84,14.73
  Bottom 0.203: Q10.2 19.18,12.95 v19.56,13.34 | U3.10 29.95,21.23 29.34,21.84 22.35,21.84 21.97,21.46 21.97,16.38 22.48,15.88 22.48,15.37 v21.84,14.73
N$42
  Bottom 0.203: Q10.6 16.36,14.2 16.38,14.22
  Bottom 0.305: R25.1 16.38,14.22 17.27,14.22 Q10.P1
N$45  (via drill 0.25)
  Route2 0.203: v14.99,10.92 v14.99,12.57
  Bottom 0.203: Q10.5 15.37,12.95 v14.99,12.57 | U4.10 30.2,8.79 29.59,9.4 21.46,9.4 19.94,10.92 v14.99,10.92
N$46
  Bottom 0.203: Q10.3 18.18,11.83 18.03,11.68 17.27,11.68
  Bottom 0.305: R34.1 17.27,11.68 Q10.P2
N$49  (via drill 0.25)
  Top 0.203: Q11.2 15.37,5.59 v14.99,5.97
  Route2 0.203: v14.99,5.97 14.99,6.48 19.05,10.54 19.05,11.05 v21.84,13.84
  Bottom 0.203: U3.9 29.83,20.59 29.08,21.34 22.61,21.34 22.35,21.08 22.35,16.64 22.86,16.13 22.86,14.86 v21.84,13.84
N$50
  Top 0.203: Q11.6 18.18,6.58 18.03,6.73 17.27,6.73
  Top 0.305: R26.1 17.14,6.86 17.27,6.73 Q11.P1
N$53  (via drill 0.25)
  Top 0.203: Q11.5 19.18,5.59 v19.56,5.21
  Bottom 0.203: U4.9 30.21,8.14 29.34,9.02 21.59,9.02 20.32,7.75 20.32,5.97 v19.56,5.21
N$54
  Top 0.203: Q11.3 16.36,4.42 16.26,4.32
  Top 0.305: R35.1 16.26,4.32 17.14,4.32 17.27,4.45 Q11.P2
N$57  (via drill 0.25)
  Route2 0.203: v19.81,8.64 19.81,11.05 v21.84,13.08
  Bottom 0.203: Q12.2 19.18,5.59 19.81,6.22 v19.81,8.64 | U3.7 34.57,21.23 33.4,20.07 29.46,20.07 29.21,20.32 23.11,20.32 22.73,19.94 22.73,16.89 23.24,16.38 23.24,14.48 v21.84,13.08
N$58
  Bottom 0.203: Q12.6 16.36,6.84 16.38,6.86
  Bottom 0.305: R27.1 16.38,6.86 17.14,6.86 17.27,6.73 Q12.P1
N$61  (via drill 0.25)
  Route2 0.203: v14.99,3.56 v14.99,5.21
  Bottom 0.203: Q12.5 15.37,5.59 v14.99,5.21 | U4.7 33.81,8.79 32.51,7.49 30.23,7.49 29.08,8.64 21.84,8.64 20.83,7.62 20.83,5.33 19.05,3.56 v14.99,3.56
N$62
  Bottom 0.203: Q12.3 18.18,4.59 18.03,4.45 17.27,4.45
  Bottom 0.305: R36.1 17.14,4.32 17.27,4.45 Q12.P2
N$65
  Top 0.406: F1.1 50.56,28.59
  Top 0.61: 50.56,28.59 51.05,29.08 52.36,29.08 LF1.2
N$66
  Top 0.203: U1.10 47.99,23.35 48.01,23.37 48.01,22.86 | U1.9 48,22.85 48.01,22.86 | U1.7 47.76,21.85 48.01,22.1 48.01,22.86
  Top 0.305: C1.P 46.1,28.83 47.75,30.48 TP1.P$1
  Top 0.406: 49.7,23.62 C2.1 | C2.1 49.78,23.88 | 49.91,26.67 50.3,26.67 F1.2 | C1.P 46.05,28.75 49.02,25.78 | C3.1 C2.1
  Top 0.61: 48.01,23.37 48.26,23.37 48.51,23.62 49.7,23.62 | 49.78,23.88 49.02,24.64 49.02,25.78 49.91,26.67
N$68
  Top 0.203: U1.3 43.43,22.35 42.93,21.84 42.79,21.84 C5.2 42.16,21.21 41.78,21.21 R1.1 41.01,21.21 40.51,21.21 R2.2
PWR0
  Top 0.203: U2.1 38.34,14.23 38.35,14.22 41.78,14.22 | 41.78,14.22 45.21,10.79 J1.B15 | R3.2 41.78,14.22
PWR1  (via drill 0.25)
  Top 0.203: U2.2 38.45,14.88 38.48,14.86 v40.64,14.86 R4.2 | J1.B16 54.99,9.53 54.23,10.29 44.96,10.29 41.66,13.59 v40.64,13.59
  Bottom 0.203: v40.64,14.86 v40.64,13.59
PWR2  (via drill 0.25)
  Top 0.203: U2.3 38.57,15.54 38.61,15.49 v39.5,15.49 R5.2 | J1.B17 54.99,8.26 53.47,9.78 44.7,9.78 41.53,12.95 40.13,12.95 v39.5,13.59
  Bottom 0.203: v39.5,15.49 v39.5,13.59
ROW0  (via drill 0.25)
  Top 0.203: J1.B5 v54.99,23.5 | v44.96,17.27 v44.96,19.18
  Bottom 0.203: U4.1 38.34,12.69 38.35,12.7 40.89,12.7 44.96,16.76 v44.96,17.27 | v54.99,23.5 50.67,19.18 v44.96,19.18 44.58,19.18 38.61,25.15 38.35,25.15 38.34,25.14 U3.1
ROW1  (via drill 0.25)
  Top 0.203: J1.B6 v54.99,22.23 | v45.59,17.27 v45.59,18.54
  Bottom 0.203: U4.2 38.33,12.04 38.35,12.06 41.02,12.06 45.59,16.64 v45.59,17.27 | v54.99,22.23 51.31,18.54 v45.59,18.54 44.45,18.54 38.48,24.51 38.35,24.51 38.33,24.48 U3.2
ROW2  (via drill 0.25)
  Top 0.203: J1.B7 v54.99,20.95
  Bottom 0.203: U4.3 38.31,11.39 38.35,11.43 41.15,11.43 46.23,16.51 46.23,17.91 | v54.99,20.95 51.94,17.91 46.23,17.91 | 46.23,17.91 44.32,17.91 38.4,23.84 U3.3
V4P2  (via drill 0.25)
  Top 0.203: Q3.1 26.53,20.72 v26.42,20.83 v25.78,20.83 | Q3.4 29.35,19.42 v29.46,19.3 v29.46,18.67 | Q4.1 26.53,28.08 v26.42,28.19 v25.78,28.19 | Q4.4 29.35,26.78 v29.46,26.67 v29.46,26.04 | Q2.1 26.53,13.6 v26.42,13.72 v25.78,13.72 | Q2.4 29.32,12.3 v29.46,12.45 v29.46,11.81 | Q1.1 26.53,6.24 v26.42,6.35 v25.78,6.35 | Q1.4 29.35,4.94 v29.46,4.83 v29.46,4.19 | C7.1 v32.77,25.15 | U2.6 35.98,17.48 v35.94,17.53 | v32.77,14.22 32.76,14.23 U2.16 31.5,14.13 31.5,13.59 32,13.08 C9.1 | U1.2 43.44,22.85 v43.43,22.86 43.31,22.99 42.93,22.99 C5.1 42.16,22.99 41.78,22.99 R1.2 | U1.1 43.58,23.35 v43.43,23.5 | v32.77,12.7 33.39,12.7 C8.1
  Top 0.406: v30.1,27.56 30.78,27.56 C11.1 | v30.1,5.59 30.91,5.59 C10.1 | v43.43,22.86 v43.43,23.5 v43.43,24.13 43.43,24.38 43.18,24.64 C6.1
  Bottom 0.203: U3.16 32.76,25.14 v32.77,25.15 | U4.16 32.76,12.69 v32.77,12.7
  other vias: 37.08,5.08
  pour Route2 (isolate 0.254, rank 2): 24.64,30.23 25.65,31.24 43.05,31.24 44.07,30.23 44.07,2.79 43.05,1.78 25.65,1.78 24.64,2.79
V5P0_IN
  Top 0.305: J1.A3 58.55,26.04 58.93,26.42 58.93,28.57 J1.A1 | J1.B3 54.86,26.04 | 54.61,28.57 54.61,28.45 54.74,28.57 J1.B1
  Top 0.406: 54.61,28.57 54.61,29.21 54.99,29.59 58.29,29.59 58.93,28.96 58.93,28.57 | 54.86,26.04 54.23,26.67 54.23,27.69 54.61,28.07 54.61,28.45 | LF1.1 52.96,26.8
  Top 0.61: 52.96,26.8 53.34,26.42 53.98,26.42 54.23,26.67
VLED  (via drill 0.25)
  Top 0.305: J2.3 v6.35,22.86 | J2.8 v10.41,20.32 | J2.14 v10.41,16.51 | J2.20 v10.41,12.7 | J2.9 v2.29,19.05 | J2.15 v2.29,15.24 | J2.21 v2.29,11.43 | J2.26 v6.35,8.89 | J2.2 v10.41,24.13
  Route2 1.016: v17.78,16.51 v10.41,16.51 | v21.59,28.57 19.68,30.48 11.68,30.48 9.91,28.7 9.91,26.67 | v21.59,4.45 19.68,2.54 9.4,2.54 7.62,4.32 7.62,6.6
  Bottom 0.203: D2.C D9.C
  Bottom 0.254: D8.C 7.62,10.16 v6.35,11.43 | D11.C 6.73,19.43 v6.35,19.05 6.99,18.41 7.24,18.41 7.62,18.03 D4.C | D10.C 3.56,21.59 v2.29,22.86 3.56,24.13 D1.C | D12.C 3.56,18.03 3.05,18.54 2.79,18.54 v2.29,19.05 2.54,19.3 2.79,19.3 3.56,20.07 D3.C | D9.C 7.81,23.56 J2.2 v10.41,24.13 | D13.C 6.48,15.37 v6.35,15.24 7.62,13.97 D6.C | D15.C 7.55,7.68 v6.35,8.89 | D14.C 3.56,13.97 v2.29,15.24 3.56,16.51 D5.C | D16.C 3.56,10.16 v2.29,11.43 2.79,11.94 3.05,11.94 3.56,12.45 D7.C
  other vias: 21.59,27.43 21.59,26.29 21.59,5.59 21.59,6.73 18.54,16.51 19.3,16.51
  pour Top (isolate 0.254): 20.07,30.48 21.08,31.5 22.61,31.5 23.62,30.48 23.62,2.54 22.61,1.52 21.08,1.52 20.07,2.54 20.07,13.46 17.27,16.26 17.27,16.76 20.07,19.56
  pour Route2 (isolate 0.254): 11.18,26.16 10.16,27.18 0,27.18 0,5.84 10.16,5.84 11.18,6.86
  pour Route2 (isolate 0.254): 20.07,30.48 21.08,31.5 22.61,31.5 23.62,30.48 23.62,2.54 22.61,1.52 21.08,1.52 20.07,2.54 20.07,13.46 17.27,16.26 17.27,16.76 20.07,19.56

## Text on the board
Bottom: BZ
tPlace: LED0A | VLED | Vin | S | Opt. / Cut | 4.2V | LED7B
bPlace: S | NinjaNIRS 2022 / Source Interface (7LVL) / v02 3/2023